# Altium PCB power_SUPµ.PcbDoc
Units mil, origin at the board's own origin, x right, y up, seen from the top; angles counter-clockwise.
Board outline 6000 x 4000 mil, 2 copper layers (Top Layer, Bottom Layer); 201 components, 138 nets, 531 pads, 0 vias.
Unrouted connection lines stored in the file: 315.
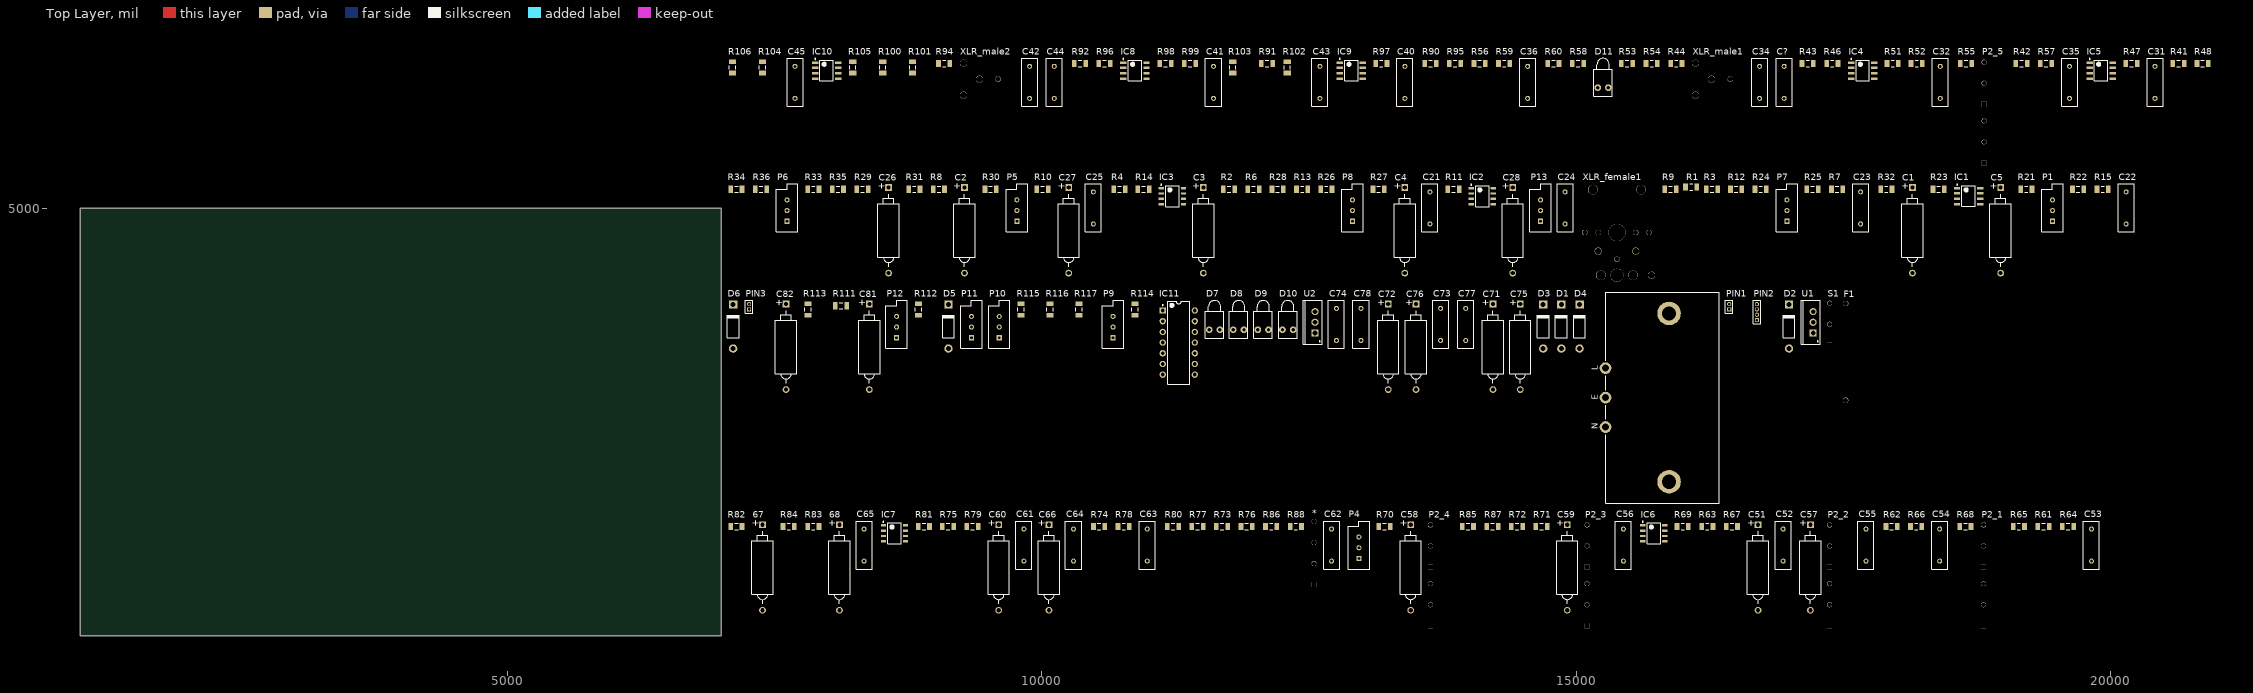
[diagram p0: Top Layer view]
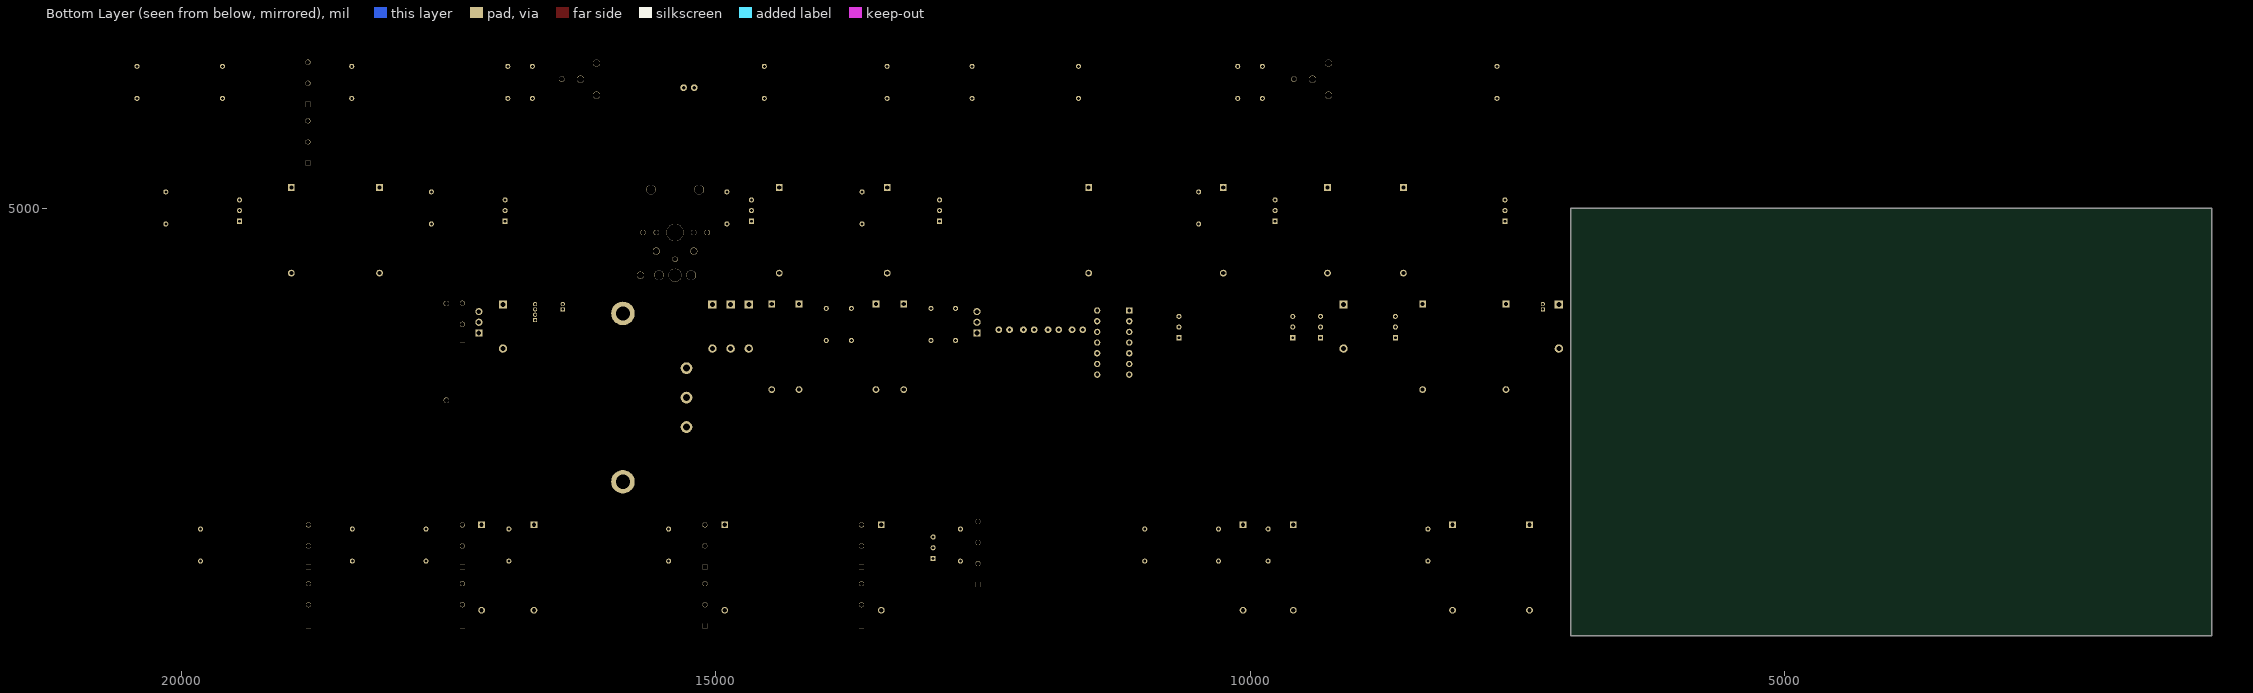
[diagram p1: Bottom Layer view, seen from below]

## Layer stack, top to bottom
Top Solder: solder mask 0.4, Solder Resist, Dk 3.5
Top Layer: signal copper 1.4
Dielectric 1: dielectric 12.6, FR-4, Dk 4.8
Bottom Layer: signal copper 1.4
Bottom Solder: solder mask 0.4, Solder Resist, Dk 3.5

## Board outline
1000,1000 7000,1000 7000,5000 1000,5000

## Design rules (kind name [scope] priority, off if disabled: settings)
Clearance [All] p1: gap=10 ignorepadtopadclearanceinfootprint=FALSE except(0: Arc-Hole Track-Hole SMDPad-Hole THPad-Hole Via-Hole Fill-Hole Poly-Hole Region-Hole Text-Hole)
PolygonConnect [All] p1: connectstyle=Relief reliefconductorwidth=10 reliefentries=4 polygonreliefangle="90 Angle" airgapwidth=10
RoomDefinition summing_circuit [InComponentClass('summing_circuit')] p1: confinementstyle=ConfineIn formatcopy=TRUE lockcomponents=FALSE outline 7045,5390 20960,5390 20960,6515 7045,6515
RoomDefinition schema_mixer [InComponentClass('schema_mixer')] p2: confinementstyle=ConfineIn formatcopy=TRUE lockcomponents=FALSE outline 7045,4300 20255,4300 20255,5340 7045,5340
RoomDefinition power_SUP [InComponentClass('power_SUP')] p3: confinementstyle=ConfineIn formatcopy=TRUE lockcomponents=FALSE outline 7045,2230 17600,2230 17600,4250 7045,4250
RoomDefinition cinch_stereo_ingang [InComponentClass('cinch_stereo_ingang')] p4: confinementstyle=ConfineIn formatcopy=TRUE lockcomponents=FALSE outline 7045,1060 19930,1060 19930,2185 7045,2185
RoutingVias [All] p1: holewidth=28 width=50 viastyle="Through Hole" minholewidth=28 minwidth=50 maxholewidth=28 maxwidth=50
SolderMaskExpansion [All] p1: expansion=4 istentingtop=FALSE
Width [All] p1: maxlimit=10 minlimit=10 preferedwidth=10
30 further rules are at their usual default settings.

## Classes and differential pairs
component class summing_circuit: C31 C32 C34 C35 C36 C40 C41 C42 C43 C44 C45 C? D11 IC4 IC5 IC8 IC9 IC10 P2_5 R41 R42 R43 R44 R46 R47 R48 R51 R52 R53 R54 R55 R56 R57 R58 R59 R60 R90 R91 R92 R94 R95 R96 R97 R98 R99 R100 R101 R102 R103 R104 R105 R106 XLR_male1 XLR_male2
component class schema_mixer: C1 C2 C3 C4 C5 C21 C22 C23 C24 C25 C26 C27 C28 IC1 IC2 IC3 P1 P5 P6 P7 P8 P13 R1 R2 R3 R4 R6 R7 R8 R9 R10 R11 R12 R13 R14 R15 R21 R22 R23 R24 R25 R26 R27 R28 R29 R30 R31 R32 R33 R34 R35 R36 XLR_female1
component class power_SUP: C71 C72 C73 C74 C75 C76 C77 C78 C81 C82 D1 D2 D3 D4 D5 D6 D7 D8 D9 D10 F1 IC11 P9 P10 P11 P12 PIN1 PIN2 PIN3 R111 R112 R113 R114 R115 R116 R117 S1
component class cinch_stereo_ingang: 67 68 * C51 C52 C53 C54 C55 C56 C57 C58 C59 C60 C61 C62 C63 C64 C65 C66 IC6 IC7 P2_1 P2_2 P2_3 P2_4 P4 R61 R62 R63 R64 R65 R66 R67 R68 R69 R70 R71 R72 R73 R74 R75 R76 R77 R78 R79 R80 R81 R82 R83 R84 R85 R86 R87 R88

## Components (designator, comment, footprint, x,y, rotation, side; value= is the part's Value field where it differs from the comment)
67 "Cap Pol2" POLAR0.8 7385,1640 r90 top value=100uF
68 "Cap Pol2" POLAR0.8 8105,1640 r90 top value=4u7F
* "cinch_female" header_4 12545,1480 r90 top
C1 "Cap Pol2" POLAR0.8 18145,4795 r90 top value=10uF
C2 "Cap Pol2" POLAR0.8 9275,4795 r90 top value=10uF
C3 "Cap Pol2" POLAR0.8 11510,4795 r90 top value=100uF
C4 "Cap Pol2" POLAR0.8 13395,4795 r90 top value=10uF
C5 "Cap Pol2" POLAR0.8 18970,4795 r90 top value=100uF
C21 "Cap" RAD-0.3 13630,5005 r90 top value=100pF
C22 "Cap" RAD-0.3 20145,5005 r90 top value=47nF
C23 "Cap" RAD-0.3 17660,5005 r90 top value=4n7F
C24 "Cap" RAD-0.3 14895,5005 r90 top value=22nF
C25 "Cap" RAD-0.3 10480,5005 r90 top value=4n7F
C26 "Cap Pol2" POLAR0.8 8565,4795 r90 top value=100uF
C27 "Cap Pol2" POLAR0.8 10250,4795 r90 top value=4u7F
C28 "Cap Pol2" POLAR0.8 14405,4795 r90 top value=100uF
C31 "Cap" RAD-0.3 20415,6180 r90 top value=10uF
C32 "Cap" RAD-0.3 18405,6180 r90 top value=100pF
C34 "Cap" RAD-0.3 16715,6180 r90 top value=100pF
C35 "Cap" RAD-0.3 19615,6180 r90 top value=22uF
C36 "Cap" RAD-0.3 14545,6180 r90 top value=22uF
C40 "Cap" RAD-0.3 13395,6180 r90 top value=10uF
C41 "Cap" RAD-0.3 11605,6180 r90 top value=100pF
C42 "Cap" RAD-0.3 9885,6180 r90 top value=100nF
C43 "Cap" RAD-0.3 12600,6180 r90 top value=22uF
C44 "Cap" RAD-0.3 10115,6180 r90 top value=100pF
C45 "Cap" RAD-0.3 7690,6180 r90 top value=22uF
C51 "Cap Pol2" POLAR0.8 16700,1640 r90 top value=10uF
C52 "Cap" RAD-0.3 16935,1850 r90 top value=100pF
C53 "Cap" RAD-0.3 19820,1850 r90 top value=47nF
C54 "Cap" RAD-0.3 18400,1850 r90 top value=4n7F
C55 "Cap" RAD-0.3 17710,1850 r90 top value=22nF
C56 "Cap" RAD-0.3 15440,1850 r90 top value=4n7F
C57 "Cap Pol2" POLAR0.8 17190,1640 r90 top value=100uF
C58 "Cap Pol2" POLAR0.8 13450,1640 r90 top value=100uF
C59 "Cap Pol2" POLAR0.8 14915,1640 r90 top value=4u7F
C60 "Cap Pol2" POLAR0.8 9595,1640 r90 top value=10uF
C61 "Cap" RAD-0.3 9830,1850 r90 top value=100pF
C62 "Cap" RAD-0.3 12710,1850 r90 top value=47nF
C63 "Cap" RAD-0.3 10985,1850 r90 top value=4n7F
C64 "Cap" RAD-0.3 10295,1850 r90 top value=22nF
C65 "Cap" RAD-0.3 8335,1850 r90 top value=4n7F
C66 "Cap Pol2" POLAR0.8 10065,1640 r90 top value=100uF
C71 "Cap Pol2" POLAR0.8 14220,3705 r90 top value=2.2mF
C72 "Cap Pol2" POLAR0.8 13240,3705 r90 top value=2.2mF
C73 "Cap" RAD-0.3 13730,3915 r90 top value=220pF
C74 "Cap" RAD-0.3 12755,3915 r90 top value=220pF
C75 "Cap Pol2" POLAR0.8 14475,3705 r90 top value=100uF
C76 "Cap Pol2" POLAR0.8 13500,3705 r90 top value=100uF
C77 "Cap" RAD-0.3 13965,3915 r90 top value=100pF
C78 "Cap" RAD-0.3 12985,3915 r90 top value=100pF
C81 "Cap Pol2" POLAR0.8 8385,3705 r90 top value=47uF
C82 "Cap Pol2" POLAR0.8 7605,3705 r90 top value=47uF
C? "Cap" RAD-0.3 16945,6180 r90 top value=100nF
D1 "Diode 1N4007" DO-41 14860,3895 r90 top
D2 "Diode 1N4007" DO-41 16990,3895 r90 top
D3 "Diode 1N4007" DO-41 14690,3895 r90 top
D4 "Diode 1N4007" DO-41 15030,3895 r90 top
D5 "Diode 1N4007" DO-41 9125,3895 r90 top
D6 "Diode 1N4007" DO-41 7110,3895 r90 top
D7 "LED1" LED-1 11615,3865 r90 top
D8 "LED1" LED-1 11840,3865 r90 top
D9 "LED1" LED-1 12070,3865 r90 top
D10 "LED1" LED-1 12300,3865 r90 top
D11 "LED1" LED-1 15250,6130 r90 top
F1 "Fuse_case" fluse_holder 17520,3205 r90 top
IC1 "LM833DR2G" OPAMP_LM833 18670,5115 r0 top
IC2 "TL061CD" OPAMP_TL061 14120,5115 r0 top
IC3 "TL061CD" OPAMP_TL061 11220,5115 r0 top
IC4 "LM833DR2G" OPAMP_LM833 17680,6290 r0 top
IC5 "LM833DR2G" OPAMP_LM833 19910,6290 r0 top
IC6 "TL061CD" OPAMP_TL061 15725,1960 r0 top
IC7 "TL061CD" OPAMP_TL061 8620,1960 r0 top
IC8 "LM833DR2G" OPAMP_LM833 10870,6290 r0 top
IC9 "LM833DR2G" OPAMP_LM833 12895,6290 r0 top
IC10 "LM833DR2G" OPAMP_LM833 7985,6290 r0 top
IC11 "LM339N" OPAMP_LM339 11280,3745 r0 top
P1 "RPot" VR5 19455,4980 r90 top value=100K
P2_1 "dual_pot" header_6 18810,1095 r90 top
P2_2 "dual_pot" header_6 17370,1095 r90 top
P2_3 "dual_pot_1" header_6 15100,1095 r90 top
P2_4 "dual_pot_1" header_6 13635,1095 r90 top
P2_5 "dual_pot" header_6 18815,5425 r90 top
P4 "RPot" VR5 12965,1825 r90 top value=10K
P5 "RPot" VR5 9765,4980 r90 top value=47K
P6 "RPot" VR5 7615,4980 r90 top value=10K
P7 "RPot" VR5 16970,4980 r90 top value=100K
P8 "RPot" VR5 12905,4980 r90 top value=470K
P9 "RPot" VR5 10665,3890 r90 top value=47K
P10 "RPot" VR5 9600,3890 r90 top value=47K
P11 "RPot" VR5 9340,3890 r90 top value=47K
P12 "RPot" VR5 8640,3890 r90 top value=47K
P13 "RPot" VR5 14665,4980 r90 top value=470K
PIN1 "trans_in" MHDR1X2 16430,4055 r90 top
PIN2 "trans_out" MHDR1X4 16690,3955 r90 top
PIN3 "input" MHDR1X2 7260,4055 r90 top
R1 "Res2" C1206 16075,5200 r0 top value=22k
R2 "Res2" C1206 11750,5180 r0 top value=22k
R3 "Res2" C1206 16270,5180 r0 top value=2k2
R4 "Res2" C1206 10725,5180 r0 top value=2k2
R6 "Res2" C1206 11980,5180 r0 top value=180
R7 "Res2" C1206 17440,5180 r0 top value=10K
R8 "Res2" C1206 9035,5180 r0 top value=10K
R9 "Res2" C1206 15880,5180 r0 top value=10K
R10 "Res2" C1206 10005,5180 r0 top value=10K
R11 "Res2" C1206 13850,5180 r0 top value=10K
R12 "Res2" C1206 16495,5180 r0 top value=10K
R13 "Res2" C1206 12435,5180 r0 top value=560
R14 "Res2" C1206 10950,5180 r0 top value=100K
R15 "Res2" C1206 19925,5180 r0 top value=100
R21 "Res2" C1206 19210,5180 r0 top value=12k
R22 "Res2" C1206 19695,5180 r0 top value=12k
R23 "Res2" C1206 18390,5180 r0 top value=12k
R24 "Res2" C1206 16725,5180 r0 top value=3k9
R25 "Res2" C1206 17210,5180 r0 top value=3k9
R26 "Res2" C1206 12660,5180 r0 top value=1k8
R27 "Res2" C1206 13150,5180 r0 top value=1K8
R28 "Res2" C1206 12205,5180 r0 top value=22k
R29 "Res2" C1206 8320,5180 r0 top value=22k
R30 "Res2" C1206 9520,5180 r0 top value=560
R31 "Res2" C1206 8805,5180 r0 top value=100
R32 "Res2" C1206 17900,5180 r0 top value=220
R33 "Res2" C1206 7860,5180 r0 top value=4k7
R34 "Res2" C1206 7140,5180 r0 top value=4k7
R35 "Res2" C1206 8090,5180 r0 top value=10K
R36 "Res2" C1206 7370,5180 r0 top value=10K
R41 "Res2" C1206 20635,6355 r0 top value=1K
R42 "Res2" C1206 19165,6355 r0 top value=1K
R43 "Res2" C1206 17165,6355 r0 top value=1K
R44 "Res2" C1206 15935,6355 r0 top value=1K
R46 "Res2" C1206 17395,6355 r0 top value=1K
R47 "Res2" C1206 20195,6355 r0 top value=1K
R48 "Res2" C1206 20860,6355 r0 top value=10K
R51 "Res2" C1206 17960,6355 r0 top value=100K
R52 "Res2" C1206 18185,6355 r0 top value=10K
R53 "Res2" C1206 15475,6355 r0 top value=10K
R54 "Res2" C1206 15705,6355 r0 top value=10K
R55 "Res2" C1206 18645,6355 r0 top value=100K
R56 "Res2" C1206 14095,6355 r0 top value=100K
R57 "Res2" C1206 19395,6355 r0 top value=150
R58 "Res2" C1206 15015,6355 r0 top value=150
R59 "Res2" C1206 14325,6355 r0 top value=4k7
R60 "Res2" C1206 14785,6355 r0 top value=2k7
R61 "Res2" C1206 19370,2025 r0 top value=12k
R62 "Res2" C1206 17950,2025 r0 top value=3k9
R63 "Res2" C1206 16225,2025 r0 top value=1k8
R64 "Res2" C1206 19600,2025 r0 top value=12k
R65 "Res2" C1206 19140,2025 r0 top value=12k
R66 "Res2" C1206 18180,2025 r0 top value=3k9
R67 "Res2" C1206 16455,2025 r0 top value=1K8
R68 "Res2" C1206 18640,2025 r0 top value=220
R69 "Res2" C1206 15995,2025 r0 top value=22k
R70 "Res2" C1206 13205,2025 r0 top value=22k
R71 "Res2" C1206 14675,2025 r0 top value=560
R72 "Res2" C1206 14445,2025 r0 top value=100
R73 "Res2" C1206 11685,2025 r0 top value=12k
R74 "Res2" C1206 10535,2025 r0 top value=3k9
R75 "Res2" C1206 9120,2025 r0 top value=1k8
R76 "Res2" C1206 11915,2025 r0 top value=12k
R77 "Res2" C1206 11455,2025 r0 top value=12k
R78 "Res2" C1206 10765,2025 r0 top value=3k9
R79 "Res2" C1206 9350,2025 r0 top value=1K8
R80 "Res2" C1206 11225,2025 r0 top value=220
R81 "Res2" C1206 8895,2025 r0 top value=22k
R82 "Res2" C1206 7140,2025 r0 top value=22k
R83 "Res2" C1206 7860,2025 r0 top value=560
R84 "Res2" C1206 7630,2025 r0 top value=100
R85 "Res2" C1206 13985,2025 r0 top value=4k7
R86 "Res2" C1206 12145,2025 r0 top value=4k7
R87 "Res2" C1206 14215,2025 r0 top value=10K
R88 "Res2" C1206 12375,2025 r0 top value=10K
R90 "Res2" C1206 13635,6355 r0 top value=1K
R91 "Res2" C1206 12105,6355 r0 top value=1K
R92 "Res2" C1206 10355,6355 r0 top value=1K
R94 "Res2" C1206 9085,6355 r0 top value=1K
R95 "Res2" C1206 13865,6355 r0 top value=10K
R96 "Res2" C1206 10585,6355 r0 top value=1K
R97 "Res2" C1206 13175,6355 r0 top value=1K
R98 "Res2" C1206 11155,6355 r0 top value=100K
R99 "Res2" C1206 11385,6355 r0 top value=10K
R100 "Res2" C1206 8510,6320 r90 top value=10K
R101 "Res2" C1206 8790,6320 r90 top value=10K
R102 "Res2" C1206 12295,6320 r90 top value=150
R103 "Res2" C1206 11785,6320 r90 top value=100K
R104 "Res2" C1206 7385,6320 r90 top value=4k7
R105 "Res2" C1206 8230,6320 r90 top value=150
R106 "Res2" C1206 7105,6320 r90 top value=100K
R111 "Res2" C1206 8120,4090 r0 top value=10
R112 "Res2" C1206 8845,4055 r90 top value=100K
R113 "Res2" C1206 7810,4055 r90 top value=27k
R114 "Res2" C1206 10870,4055 r90 top value=470
R115 "Res2" C1206 9805,4055 r90 top value=470
R116 "Res2" C1206 10075,4055 r90 top value=470
R117 "Res2" C1206 10345,4055 r90 top value=470
S1 "switch" header_3 17370,3720 r90 top
U1 "L7812ACV" Volt_reg 17215,3935 r90 top
U2 "L7912ACV" Volt_reg 12555,3935 r90 top
XLR_female1 "XLR_female" XLR_Femail_Neutrik_NCJ6FA-V 15380,4775 r0 top
XLR_male1 "XLR_male" XLR_MALE_Neutrik_NC3_MAV 16115,6210 r90 top
XLR_male2 "XLR_male" XLR_MALE_Neutrik_NC3_MAV 9265,6210 r90 top
? "Plug AC Female" IEC7-2H3 16210,3230 r0 top

## Footprints (in the part's own frame and the unit in brackets; to place one, negate y for a bottom-side part, rotate by r counter-clockwise, add the part's x,y. Pads: shape width x height; smd on the part's side, far side on the other; paste and mask are expansions set on the pad)
C1206 [mm] "Chip Capacitor, Body 3.2x1.6mm, IPC High Density"
  rect 1.1x1.7 smd: 1(-1.35,0) 2(1.35,0)
  silkscreen extent -0.4,-0.75 0.4,0.75, body extent -1.7,-0.9 1.7,0.9, height 1.3
DO-41 [mm] "Diode, Axial; Body 5.2 x 2.7 mm (LxDia. max), Lead Dia. 0.86 mm (max)"
  round 2 hole 1.2: 1(-5.23,0)
  rect 2x2 hole 1.2: 2(5.23,0)
  silkscreen extent -2.65,-1.4 2.75,1.4
fluse_holder [mm]
  round 1.3 hole 1.2: 27(0,0) 28(23,0)
header_3 [mm]
  rect 1.2x1.2 hole 1.1 square: B1(0,0)
  round 1.2 hole 1.1: B2(5,0) B3(10,0)
header_4 [mm]
  round 1.2 hole 1.1: A2(5,0) B3(10,0) B3(15,0)
  rect 1.2x1.2 hole 1.1 square: B1(0,0)
header_6 [mm]
  rect 1.2x1.2 hole 1.1 square: B1(0,0) B1(13.97,0)
  round 1.2 hole 1.1: B2(5,0) B2(18.97,0) B3(10,0) B3(23.97,0)
IEC7-2H3 [mm] "Mains Power Outlet, IEC60 320-2-2 F, PC Flange Rear Mount"
  round 2.8 hole 1.7: 1(-23.8,7) 2(-23.8,-7) 3(-23.8,0)
  round 5.6 hole 3.4: MH1(-8.7,20) MH2(-8.7,-20)
  silkscreen extent -23.8,-25.05 3.2,25.05
LED-1 [mm] "LED; 2 Leads"
  round 1.6 hole 0.8: 1(0,1.27) 2(0,-1.27)
  silkscreen extent -2,-2.2 6.95,2.2
MHDR1X2 [mm] "Connector; Header; 2 Position"
  rect 1x1 hole 0.6: 1(0,0)
  round 1 hole 0.6: 2(1.27,0)
  silkscreen extent -0.9,-0.9 2.17,0.9
MHDR1X4 [mm] "Connector; Header; 4 Position"
  rect 1x1 hole 0.6: 1(0,0)
  round 1 hole 0.6: 2(1.27,0) 3(2.54,0) 4(3.81,0)
  silkscreen extent -0.9,-0.9 4.71,0.9
OPAMP_LM339 [mm] "DIP, 14-Leads, Body 19.7x6.6mm, Pitch 2.54mm"
  rect 1.5x1.5 hole 0.9: 1(-3.81,7.62)
  round 1.5 hole 0.9: 2(-3.81,5.08) 3(-3.81,2.54) 4(-3.81,0) 5(-3.81,-2.54) 6(-3.81,-5.08) 7(-3.81,-7.62) 8(3.81,-7.62) 9(3.81,-5.08) 10(3.81,-2.54) 11(3.81,0) 12(3.81,2.54) 13(3.81,5.08) 14(3.81,7.62)
  silkscreen extent -3.93,-9.85 2.65,9.85, body extent -3.95,-9.85 3.95,9.85, height 5.08
OPAMP_LM833 [mm] "SOIC, 8-Leads, Body 4.9x3.9mm, Pitch 1.27mm"
  rect 1.52x0.6 smd: 1(-2.74,1.905) 2(-2.74,0.635) 3(-2.74,-0.635) 4(-2.74,-1.905) 5(2.74,-1.905) 6(2.74,-0.635) 7(2.74,0.635) 8(2.74,1.905)
  silkscreen extent -2.86,-2.45 1.58,2.88, body extent -1.95,-2.45 1.95,2.45, height 1.75
OPAMP_TL061 [mm] "SOIC, 8-Leads, Body 5x4mm, Pitch 1.27mm, IPC High Density"
  rrect18% 1.25x0.55 smd: 1(-2.625,1.905) 2(-2.625,0.635) 3(-2.625,-0.635) 4(-2.625,-1.905) 5(2.625,-1.905) 6(2.625,-0.635) 7(2.625,0.635) 8(2.625,1.905)
  silkscreen extent -2.75,-2.5 1.6,2.85, body extent -3,-2.45 3,2.45, height 1.63
POLAR0.8 [mm] "Polarized Capacitor; 2 Leads"
  rect 1.6x1.6 hole 1: 1(10.16,0)
  round 1.6 hole 1: 2(-10.16,0)
  silkscreen extent -8.64,-2.54 8.64,2.54
RAD-0.3 [mm] "Radial Cap, Thru-Hole; 2 Leads; 0.3 in Pin Spacing"
  round 1.2 hole 0.7: 1(-3.81,0) 2(3.81,0)
  silkscreen extent -5.71,-1.91 5.71,1.91
Volt_reg [mm] "TO, Thru-Hole, Vertical, Heatsink Mounted; 3 In-Line Leads; Pitch 2.54 mm"
  rect 1.7x1.7 hole 1.1: 1(-2.54,0)
  round 1.7 hole 1.1: 2(0,0) 3(2.54,0)
  silkscreen extent -5.2,-1.75 5.2,2.85, body extent -5.25,-1.8 5.25,2.9, height 19.7
VR5 [mm] "Thru-Hole; 3 Leads"
  rect 1.2x1.2 hole 0.7: 1(-2.54,0)
  round 1.2 hole 0.7: 2(0,0) 3(2.54,0)
  silkscreen extent -5.08,-2.54 6.35,2.54
XLR_Femail_Neutrik_NCJ6FA-V [mm]
  round 4.1 hole 4: 1(0,0)
  round 1.3 hole 1.2: 2(-4.445,0) 3(4.445,0) 4(-7.62,0) 5(7.62,0) 10(0,-6.35)
  round 2.3 hole 2.2: 6(-5.715,10.16) 7(5.715,10.16) 11(-3.81,-10.16) 12(3.81,-10.16)
  round 1.7 hole 1.6: 8(-4.445,-4.445) 9(4.445,-4.445) 14(8.225,-10.16)
  round 3.1 hole 3: 13(0,-10.16)
XLR_MALE_Neutrik_NC3_MAV [mm]
  round 1.7 hole 1.6: 15(0,-3.81) 16(-3.81,0) 17(3.81,0)
  round 1.3 hole 1.2: 18(0,-8.25)

## Part data
67 68 C1 C2 C3 C4 C5 C26 C27 C28 C51 C57 C58 C59 C60 C66 C71 C72 C81 C82: "Polarized Capacitor (Axial)", LatestRevisionDate=17-Jul-2002, LatestRevisionNote="Re-released for DXP Platform.", PackageDescription="Polarized Capacitor; 2 Leads", PackageReference=POLAR0.8, Published=8-Jun-2000, Publisher="Altium Limited"
C21 C22 C23 C24 C25 C31 C32 C34 C35 C40 C41 C43 C44 C52 C53 C54 C55 C56 C61 C62 C63 C64 C65: "Capacitor", LatestRevisionDate=17-Jul-2002, LatestRevisionNote="Re-released for DXP Platform.", PackageDescription="Radial Cap, Thru-Hole; 2 Leads; 0.3 in Pin Spacing", PackageReference=RAD-0.3, Published=8-Jun-2000, Publisher="Altium Limited"
C36 C45: library part Cap_5, "Capacitor", LatestRevisionDate=17-Jul-2002, LatestRevisionNote="Re-released for DXP Platform.", PackageDescription="Radial Cap, Thru-Hole; 2 Leads; 0.3 in Pin Spacing", PackageReference=RAD-0.3, Published=8-Jun-2000, Publisher="Altium Limited"
C42 C73 C74 C77 C78 C?: library part Cap_3, "Capacitor", LatestRevisionDate=17-Jul-2002, LatestRevisionNote="Re-released for DXP Platform.", PackageDescription="Radial Cap, Thru-Hole; 2 Leads; 0.3 in Pin Spacing", PackageReference=RAD-0.3, Published=8-Jun-2000, Publisher="Altium Limited"
C75 C76: library part "Cap Pol2_2", "Polarized Capacitor (Axial)", LatestRevisionDate=17-Jul-2002, LatestRevisionNote="Re-released for DXP Platform.", PackageDescription="Polarized Capacitor; 2 Leads", PackageReference=POLAR0.8, Published=8-Jun-2000, Publisher="Altium Limited"
D1 D2 D3 D4 D5 D6: "1 Amp General Purpose Rectifier", Code_JEDEC=DO-204-AL, ComponentLink1Description="Manufacturer Link", ComponentLink1URL=http://www.fairchildsemi.com/, ComponentLink2Description=Datasheet, ComponentLink2URL=http://www.fairchildsemi.com/ds/1N%2F1N4001.pdf, DatasheetVersion=1998, LatestRevisionDate=17-Jul-2002, LatestRevisionNote="Re-released for DXP Platform.", PackageDescription="Diode, Axial; Body 5.2 x 2.7 mm (LxDia. max), Lead Dia. 0.86 mm (max)", PackageReference=DO-41, PackageVersion=Aug-1999, Published=8-Jun-2000, Publisher="Altium Limited"
D7 D8 D9 D10 D11: "Typical RED GaAs LED", LatestRevisionDate=08-Jul-2005, LatestRevisionNote="Mech Layer 1 removed.", PackageDescription="LED; 2 Leads", PackageReference=LED-1, Published=8-Jun-2000, Publisher="Altium Limited"
IC1 IC4 IC5 IC8 IC9 IC10: library part opamp_LM833, "Low Noise, Audio Dual Operational Amplifier, -40 to 85 degC, 8-Pin SOIC, Pb-Free, Tape and Reel", Manufacturer="On Semiconductor", ComponentLink1Description="Manufacturer URL", ComponentLink1URL=http://www.onsemi.com/, ComponentLink2Description=Datasheet, ComponentLink2URL=http://www.onsemi.cn/pub_link/Collateral/LM833-D.PDF, ComponentLink3Description="Package Specification", ComponentLink3URL=http://www.onsemi.com/pub_link/Collateral/751-07.PDF, DatasheetVersion="Rev. 6", GBW Typ (MHz)=15, Mounting Technology="Surface Mount", PackageDescription="8-Pin Small Outline Integrated Circuit, Body 4.9 x 3.9 mm, Pitch 1.27 mm", PackageReference=SOIC-8-751-07, PackageVersion="Rev. AK, 02/2011", Packing="Tape and Reel", PartNumber=LM833DR2G, RoHS=TRUE, SR Typ (V/uS)=7
IC2: library part opamp_L061, "Low-Power JFET-Input General-Purpose Operational Amplifier, 7 to 36 V, 0 to 70 degC, 8-pin SOIC (D8), Green (RoHS & no Sb/Br)", Manufacturer="Texas Instruments", Rating=Military, Total Supply Voltage(Max)(+5V is 5, +/-5V is 10)=36, Total Supply Voltage(Min)(+5V is 5, +/-5V is 10)=7, CMRR(Min)(dB)=70, Code_JEDEC=MS-012, ComponentLink1Description="Manufacturer URL", ComponentLink1URL=http://www.ti.com/, ComponentLink2Description=Datasheet, ComponentLink2URL=http://www.ti.com/lit/ds/symlink/tl061.pdf, ComponentLink3Description="Package Specification", ComponentLink3URL=http://www.ti.com/litv/pdf/msoi002j, DatasheetVersion=SLOS078J, Eco-Plan="Green (RoHS & no Sb/Br)", GBW(Typ)(MHz)=1, IIB(Max)(pA)=400, Iq per channel(Max)(mA)=0.25, Mounting Technology="Surface Mount", Number of Channels=1, Offset Drift(Typ)(uV/C)=10, PackageDescription="8-Pin Plastic Small Outline, Body 4.9 x 3.9 mm, Pitch 1.27 mm", PackageReference=D0008A, PackageVersion="4040047-3/M, 06/2011", PartNumber=TL061CD, Slew Rate(Typ)(V/us)=3.5, Sub Family="General Purpose Amplifier, High Supply Voltage Amplifier (>=30V), Low Power Amp (<=500uA)", Vio (25C)(Max)(mV)=15, Vn at 1kHz(Typ)(nV/rtHz)=42
IC3 IC6 IC7: library part opamp_TL061, "Low-Power JFET-Input General-Purpose Operational Amplifier, 7 to 36 V, 0 to 70 degC, 8-pin SOIC (D8), Green (RoHS & no Sb/Br)", Manufacturer="Texas Instruments", Rating=Military, Total Supply Voltage(Max)(+5V is 5, +/-5V is 10)=36, Total Supply Voltage(Min)(+5V is 5, +/-5V is 10)=7, CMRR(Min)(dB)=70, Code_JEDEC=MS-012, ComponentLink1Description="Manufacturer URL", ComponentLink1URL=http://www.ti.com/, ComponentLink2Description=Datasheet, ComponentLink2URL=http://www.ti.com/lit/ds/symlink/tl061.pdf, ComponentLink3Description="Package Specification", ComponentLink3URL=http://www.ti.com/litv/pdf/msoi002j, DatasheetVersion=SLOS078J, Eco-Plan="Green (RoHS & no Sb/Br)", GBW(Typ)(MHz)=1, IIB(Max)(pA)=400, Iq per channel(Max)(mA)=0.25, Mounting Technology="Surface Mount", Number of Channels=1, Offset Drift(Typ)(uV/C)=10, PackageDescription="8-Pin Plastic Small Outline, Body 4.9 x 3.9 mm, Pitch 1.27 mm", PackageReference=D0008A, PackageVersion="4040047-3/M, 06/2011", PartNumber=TL061CD, Slew Rate(Typ)(V/us)=3.5, Sub Family="General Purpose Amplifier, High Supply Voltage Amplifier (>=30V), Low Power Amp (<=500uA)", Vio (25C)(Max)(mV)=15, Vn at 1kHz(Typ)(nV/rtHz)=42
IC11: library part opamp_LM339, "Low Power Low Offset Voltage Quad Comparator, 14-pin MDIP", Manufacturer="Texas Instruments", Package Reference=N0014A, PackageTopMarking=NSUZXYYTTE#*LM339N, PowerWise=N, Code_JEDEC=MS-001-AA, ComponentLink1Description="Datasheet URL", ComponentLink1URL=http://www.ti.com/general/docs/lit/getliterature.tsp?genericPartNumber=LM339&fileType=pdf, CompType=Amplifiers, PackageDescription="MDIP, .750 x .250 x.130in, 14 Lead, .100in Pitch", PinCount=14, RoHS=N
P1 P4 P6 P7: "Potentiometer", LatestRevisionDate=17-Jul-2002, LatestRevisionNote="Re-released for DXP Platform.", PackageDescription="Variable Resistor, Thru-Hole; 3 Leads", PackageReference=VR5, Published=8-Jun-2000, Publisher="Altium Limited", Set Position=0.5, Sim Note="Enter the Resistance value and the set point into parameter fields."
P2_5: library part dual_pot_3
P5 P8 P9 P10 P11 P12 P13: library part RPot_1, "Potentiometer", LatestRevisionDate=17-Jul-2002, LatestRevisionNote="Re-released for DXP Platform.", PackageDescription="Variable Resistor, Thru-Hole; 3 Leads", PackageReference=VR5, Published=8-Jun-2000, Publisher="Altium Limited", Set Position=0.5, Sim Note="Enter the Resistance value and the set point into parameter fields."
PIN1 PIN3: library part MHDR1X2, "Header, 2-Pin", LatestRevisionDate=17-Jul-2002, LatestRevisionNote="Re-released for DXP Platform.", Publisher="Altium Limited"
PIN2: library part MHDR1X4, "Header, 4-Pin", LatestRevisionDate=17-Jul-2002, LatestRevisionNote="Re-released for DXP Platform.", Publisher="Altium Limited"
R1 R2 R3 R4 R6 R7 R8 R9 R10 R11 R12 R13 R14 R15 R21 R22 R23 R24 R25 R26 R27 R28 R29 R30 R31 R32 R41 R42 R43 R44 R46 R47 R57 R58 R59 R61 R62 R63 R64 R65 R66 R67 R68 R69 R70 R71 R72 R73 R74 R75 R76 R77 R78 R79 R80 R81 R82 R83 R84 R90 R91 R92 R94 R96 R97 R102 R104 R105 R113: "Resistor", LatestRevisionDate=17-Jul-2002, LatestRevisionNote="Re-released for DXP Platform.", PackageDescription="Axial Device, Thru-Hole; 2 Leads; 0.4 in Pin Spacing", PackageReference=AXIAL-0.4, Published=8-Jun-2000, Publisher="Altium Limited"
R33 R34 R85 R86 R114 R115 R116 R117: library part Res2_13, "Resistor", LatestRevisionDate=17-Jul-2002, LatestRevisionNote="Re-released for DXP Platform.", PackageDescription="Axial Device, Thru-Hole; 2 Leads; 0.4 in Pin Spacing", PackageReference=AXIAL-0.4, Published=8-Jun-2000, Publisher="Altium Limited"
R35 R36 R48 R52 R53 R54 R87 R88 R95 R99 R100 R101: library part Res2_3, "Resistor", LatestRevisionDate=17-Jul-2002, LatestRevisionNote="Re-released for DXP Platform.", PackageDescription="Axial Device, Thru-Hole; 2 Leads; 0.4 in Pin Spacing", PackageReference=AXIAL-0.4, Published=8-Jun-2000, Publisher="Altium Limited"
R51 R55 R56 R98 R103 R106 R112: library part Res2_5, "Resistor", LatestRevisionDate=17-Jul-2002, LatestRevisionNote="Re-released for DXP Platform.", PackageDescription="Axial Device, Thru-Hole; 2 Leads; 0.4 in Pin Spacing", PackageReference=AXIAL-0.4, Published=8-Jun-2000, Publisher="Altium Limited"
R60: library part Res_16, "Resistor", LatestRevisionDate=17-Jul-2002, LatestRevisionNote="Re-released for DXP Platform.", PackageDescription="Axial Device, Thru-Hole; 2 Leads; 0.4 in Pin Spacing", PackageReference=AXIAL-0.4, Published=8-Jun-2000, Publisher="Altium Limited"
R111: library part Res2_2, "Resistor", LatestRevisionDate=17-Jul-2002, LatestRevisionNote="Re-released for DXP Platform.", PackageDescription="Axial Device, Thru-Hole; 2 Leads; 0.4 in Pin Spacing", PackageReference=AXIAL-0.4, Published=8-Jun-2000, Publisher="Altium Limited"
U1: library part 7812, "Positive Voltage Regulator, 12V, 3-Pin TO-220", ComponentLink1Description="Manufacturer URL", ComponentLink1URL=http://www.st.com, ComponentLink2Description=Datasheet, ComponentLink2URL=http://www.st.com/internet/com/TECHNICAL_RESOURCES/TECHNICAL_LITERATURE/DATASHEET/CD00000444.pdf, ComponentLink3Description="Package Specification", ComponentLink3URL=http://www.st.com/internet/com/TECHNICAL_RESOURCES/TECHNICAL_LITERATURE/PACKAGE_INFORMATION/CD00004649.pdf, DatasheetVersion=16/11/2011, PackageDescription="TO, Thru-Hole, Vertical, Heatsink Mounted; 3 In-Line Leads; Pitch 2.54 mm", PackageReference=TO220, PackageVersion=ver3.0
U2: library part 7912, "2% Negative Voltage Regulator, -12V, 3-Pin TO-220", ComponentLink1Description="Manufacturer URL", ComponentLink1URL=http://www.st.com, ComponentLink2Description=Datasheet, ComponentLink2URL=http://www.st.com/internet/com/TECHNICAL_RESOURCES/TECHNICAL_LITERATURE/DATASHEET/CD00000451.pdf, ComponentLink3Description="Package Specification", ComponentLink3URL=http://www.st.com/internet/com/TECHNICAL_RESOURCES/TECHNICAL_LITERATURE/PACKAGE_INFORMATION/CD00004649.pdf, DatasheetVersion=1/11/2010, PackageDescription="TO, Thru-Hole, Vertical, Heatsink Mounted; 3 In-Line Leads; Pitch 2.54 mm", PackageReference=TO220, PackageVersion=ver3.0
?: "IEC Mains Power Outlet, EN60 320-2-2 F Class I, PC Flange Rear Mount, Chassis Socket", MaximumRating="10A, 250V a.c. (UL & CSA 15A, 250V a.c.)", PackageDocument="ver.80, 15-Sep-2003", ComponentLink1Description="Manufacturer Link", ComponentLink1URL=http://www.bulgin.co.uk/, DatasheetDocument="ver.80, 15-Sep-2003", DrillSize="Corresponds to nominal value.", LatestRevisionDate=15-Jul-2004, LatestRevisionNote="Component Replaced & renamed from \"Phonejack\".", MountingFixtures="Not drawn on schematic symbol.", PackageReference=PX0675/PC, PCB_Layout="Complies with manufacturer's recommendation.", Published=15-Jul-2004, Publisher="Altium Limited", Terminations="P.C. Spills"

## Nets (pads, with @x,y where several pads share a name; then routed paths per layer and width w, separated by ;. In a path a pad name is that pad's centre, name@x,y a point inside that pad or via, vN(x,y) a via of type N, cw(c..) or ccw(c..) an arc to the next point about the centre after c; other vN are vias at no path point)
GND: 67.2 ?.2 C3.2 C5.2 C26.2 C28.2 C32.1 C41.1 C42.1 C57.2 C58.2 C66.2 C71.2 C72.1 C73.1 C74.2 C75.2 C76.1 C77.1 C78.2 C?.1 IC4.3 IC4.5 IC8.3 IC8.5 IC11.12 P4.3 P5.2 P6.3 P9.2 P10.2 P11.2 P12.2 PIN2.2 PIN2.3 R2.1 R14.1 R29.1 R31.1 R51.1 R52.1 R55.1 R56.1 R59.1 R70.1 R72.1 R82.1 R84.1 R98.1 R99.1 R103.1 R104.1 R106.1 R113.2 U1.2 U2.2 XLR_female1.1 XLR_female1.4
L1: R35.2 R41.1
L2: R42.1 R87.2
L3: R43.1
L4: R44.1
Net67_1: 67.1 IC7.3 R81.1 R82.2
Net68_1: 68.1 R83.2
Net68_2: 68.2 R84.2
Net*_1: C60.1
Net*_2: C51.1
Net_1: ?.1
Net_3: ?.3 PIN1.2
NetC1_1: C1.1 IC1.3 R3.2
NetC1_2: C1.2 XLR_female1.3 XLR_female1.6
NetC2_1: C2.1 IC1.5 R4.1
NetC2_2: C2.2 XLR_female1.2 XLR_female1.5
NetC3_1: C3.1 R1.1 R2.2 R3.1 R4.2 R11.1
NetC4_1: C4.1 R13.2
NetC4_2: C4.2 C21.1 R14.2
NetC5_1: C5.1 IC1.8 IC2.7 R1.2 R15.1
NetC21_2: C21.2 R21.1 R24.1 R26.1
NetC22_1: C22.1 P1.1 R21.2
NetC22_2: C22.2 P1.2 R22.1
NetC23_1: C23.1 P7.1 R24.2
NetC23_2: C23.2 P7.2 R25.1
NetC24_1: C24.1 P7.3
NetC24_2: C24.2 C25.2 IC3.2 R23.2
NetC25_1: C25.1 P8.3
NetC26_1: C26.1 IC3.3 R28.1 R29.2
NetC27_1: C27.1 R30.2
NetC27_2: C27.2 P5.1 R31.2
NetC28_1: C28.1 IC3.7 R28.2 R32.1
NetC31_1: C31.1 R51.2
NetC31_2: C31.2 C32.2 IC5.3 R52.2
NetC34_1: C34.1 IC5.6 R53.2 R54.1
NetC34_2: C34.2 C36.1 IC5.7 R54.2
NetC35_1: C35.1 IC5.1 IC5.2 R53.1
NetC35_2: C35.2 R55.2 R57.1
NetC36_2: C36.2 R56.2 R58.1
NetC40_1: C40.1 R98.2
NetC40_2: C40.2 C41.2 IC9.3 R99.2
NetC43_1: C43.1 IC9.1 IC9.2 R100.1
NetC43_2: C43.2 R102.1 R103.2
NetC44_1: C44.1 IC10.6 R100.2 R101.1
NetC44_2: C44.2 C45.1 IC10.7 R101.2
NetC45_2: C45.2 R105.1 R106.2
NetC51_2: C51.2 C52.1
NetC52_2: C52.2 R61.1 R62.1 R63.1
NetC53_1: C53.1 R61.2
NetC53_2: C53.2 R64.1
NetC54_1: C54.1 R62.2
NetC54_2: C54.2 R66.1
NetC55_1: C55.1
NetC55_2: C55.2 C56.2 IC6.2 R65.2
NetC56_1: C56.1
NetC57_1: C57.1 IC6.7 R68.1 R69.2
NetC58_1: C58.1 IC6.3 R69.1 R70.2
NetC59_1: C59.1 R71.2
NetC59_2: C59.2 R72.2
NetC60_2: C60.2 C61.1
NetC61_2: C61.2 R73.1 R74.1 R75.1
NetC62_1: C62.1 R73.2
NetC62_2: C62.2 R76.1
NetC63_1: C63.1 R74.2
NetC63_2: C63.2 R78.1
NetC64_1: C64.1
NetC64_2: C64.2 C65.2 IC7.2 R77.2
NetC65_1: C65.1
NetC66_1: C66.1 IC7.7 R80.1 R81.2
NetC71_1: C71.1 C73.2 D2.2 D4.2 U1.1
NetC72_2: C72.2 C74.1 D1.1 D3.1 U2.1
NetC81_1: C81.1 D5.2 R112.1
NetC81_2: C81.2 C82.1 R111.2
NetC82_2: C82.2 D6.1
NetD1_2: D1.2 D2.1 PIN2.4
NetD3_2: D3.2 D4.1 PIN2.1
NetD5_1: D5.1 D6.2 PIN3.1 PIN3.2 R111.1
NetD7_2: D7.2 R114.1
NetD8_2: D8.2 R115.2
NetD9_2: D9.2 R116.2
NetD10_2: D10.2 R117.2
NetD11_1: D11.1 R60.2
NetF1_11: 
NetF1_12: PIN1.1
NetIC1_1: IC1.1 R7.2 R9.2
NetIC1_2: IC1.2 P13.1 R7.1
NetIC1_6: IC1.6 R6.1 R8.1
NetIC1_7: IC1.7 R8.2 R10.1
NetIC2_2: IC2.2 R9.1 R12.1
NetIC2_3: IC2.3 R10.2 R11.2
NetIC2_6: IC2.6 R12.2 R13.1
NetIC3_6: IC3.6 R22.2 R25.2 R27.2 R30.1
NetIC4_1: IC4.1 R46.1 R48.2
NetIC4_2: IC4.2 R41.2 R42.2 R43.2 R44.2 R48.1
NetIC4_6: IC4.6 R46.2 R47.1
NetIC4_7: IC4.7 R47.2
NetIC5_5: IC5.5 R59.2
NetIC6_6: IC6.6 R64.2 R66.2 R67.2 R71.1
NetIC7_6: IC7.6 R76.2 R78.2 R79.2 R83.1
NetIC8_1: IC8.1 R95.2 R96.1
NetIC8_2: IC8.2 R90.2 R91.2 R92.2 R94.2 R95.1
NetIC8_6: IC8.6 R96.2 R97.1
NetIC8_7: IC8.7 R97.2
NetIC10_5: IC10.5 R104.2
NetIC11_1: IC11.1 R115.1
NetIC11_2: IC11.2 R114.2
NetIC11_4: IC11.4 IC11.6 IC11.8 IC11.10 R112.2 R113.1
NetIC11_5: IC11.5 P9.3
NetIC11_7: IC11.7 P10.3
NetIC11_9: IC11.9 P11.3
NetIC11_11: IC11.11 P12.3
NetIC11_13: IC11.13 R117.1
NetIC11_14: IC11.14 R116.1
NetP1_3: P1.3 R23.1
NetP2_1_3: R65.1
NetP2_3_1: R63.2
NetP2_3_2: R67.1
NetP2_3_4: R75.2
NetP2_3_5: R79.1
NetP2_4_3: R85.1
NetP4_1: P4.1 R85.2 R87.1
NetP4_2: P4.2 R86.2 R88.1
NetP5_3: P5.3 R33.1 R34.1
NetP6_1: P6.1 R33.2 R35.1
NetP6_2: P6.2 R34.2 R36.1
NetP8_1: P8.1 R26.2
NetP8_2: P8.2 R27.1
NetP13_2: P13.2 P13.3 R6.2
NetR57_2: R57.2
NetR58_2: R58.2
NetR102_2: R102.2
NetR105_2: R105.2
R1: R90.1
R2: R36.2 R88.2 R91.1
R3: R92.1
R4: R94.1
VCC: C42.2 C75.1 C77.2 C?.2 D7.1 D8.1 D9.1 D10.1 IC4.8 IC5.8 IC8.8 IC9.8 IC11.3 P9.1 P10.1 P11.1 P12.1 R15.2 R32.2 R60.1 R68.2 R80.2 U1.3
VEE: C76.2 C78.1 D11.2 IC1.4 IC2.4 IC3.4 IC4.4 IC5.4 IC6.4 IC7.4 IC8.4 IC10.4 U2.3
pads on no net: *.A2 *.B1 *.B3 ?.MH1 ?.MH2 F1.27 F1.28 IC2.1 IC2.5 IC2.8 IC3.1 IC3.5 IC3.8 IC6.1 IC6.5 IC6.8 IC7.1 IC7.5 IC7.8 IC9.4 IC9.5 IC9.6 IC9.7 IC10.1 IC10.2 IC10.3 IC10.8 P2_1.B1 P2_1.B2 P2_1.B3 P2_2.B1 P2_2.B2 P2_2.B3 P2_3.B1 P2_3.B2 P2_3.B3 P2_4.B1 P2_4.B2 P2_4.B3 P2_5.B1 P2_5.B2 P2_5.B3 R77.1 R86.1 S1.B1 S1.B2 S1.B3 XLR_female1.7 XLR_female1.8 XLR_female1.9 XLR_female1.10 XLR_female1.11 XLR_female1.12 XLR_female1.13 XLR_female1.14 XLR_male1.15 XLR_male1.16 XLR_male1.17 XLR_male1.18 XLR_male2.15 XLR_male2.16 XLR_male2.17 XLR_male2.18

## Text inside footprints (layer, text, board x,y; h text height)
67: Top Overlay "+" at 7347.6,2020 h59.06 r90
68: Top Overlay "+" at 8067.6,2020 h59.06 r90
C1: Top Overlay "+" at 18107.6,5175 h59.06 r90
C2: Top Overlay "+" at 9237.6,5175 h59.06 r90
C3: Top Overlay "+" at 11472.6,5175 h59.06 r90
C4: Top Overlay "+" at 13357.6,5175 h59.06 r90
C5: Top Overlay "+" at 18932.6,5175 h59.06 r90
C26: Top Overlay "+" at 8527.6,5175 h59.06 r90
C27: Top Overlay "+" at 10212.6,5175 h59.06 r90
C28: Top Overlay "+" at 14367.6,5175 h59.06 r90
C51: Top Overlay "+" at 16662.6,2020 h59.06 r90
C57: Top Overlay "+" at 17152.6,2020 h59.06 r90
C58: Top Overlay "+" at 13412.6,2020 h59.06 r90
C59: Top Overlay "+" at 14877.6,2020 h59.06 r90
C60: Top Overlay "+" at 9557.6,2020 h59.06 r90
C66: Top Overlay "+" at 10027.6,2020 h59.06 r90
C71: Top Overlay "+" at 14182.6,4085 h59.06 r90
C72: Top Overlay "+" at 13202.6,4085 h59.06 r90
C75: Top Overlay "+" at 14437.6,4085 h59.06 r90
C76: Top Overlay "+" at 13462.6,4085 h59.06 r90
C81: Top Overlay "+" at 8347.6,4085 h59.06 r90
C82: Top Overlay "+" at 7567.6,4085 h59.06 r90
?: Top Overlay "N" at 15202.13,2934.72 h59.06 r90; Top Overlay "E" at 15202.13,3210.32 h59.06 r90; Top Overlay "L" at 15202.13,3485.91 h59.06 r90; Mechanical 1 "PCB Edge" at 16194.25,2269.37 h19.68 r90